# EAGLE board Schema_Electro_v4 (EAGLE 9.7.0)
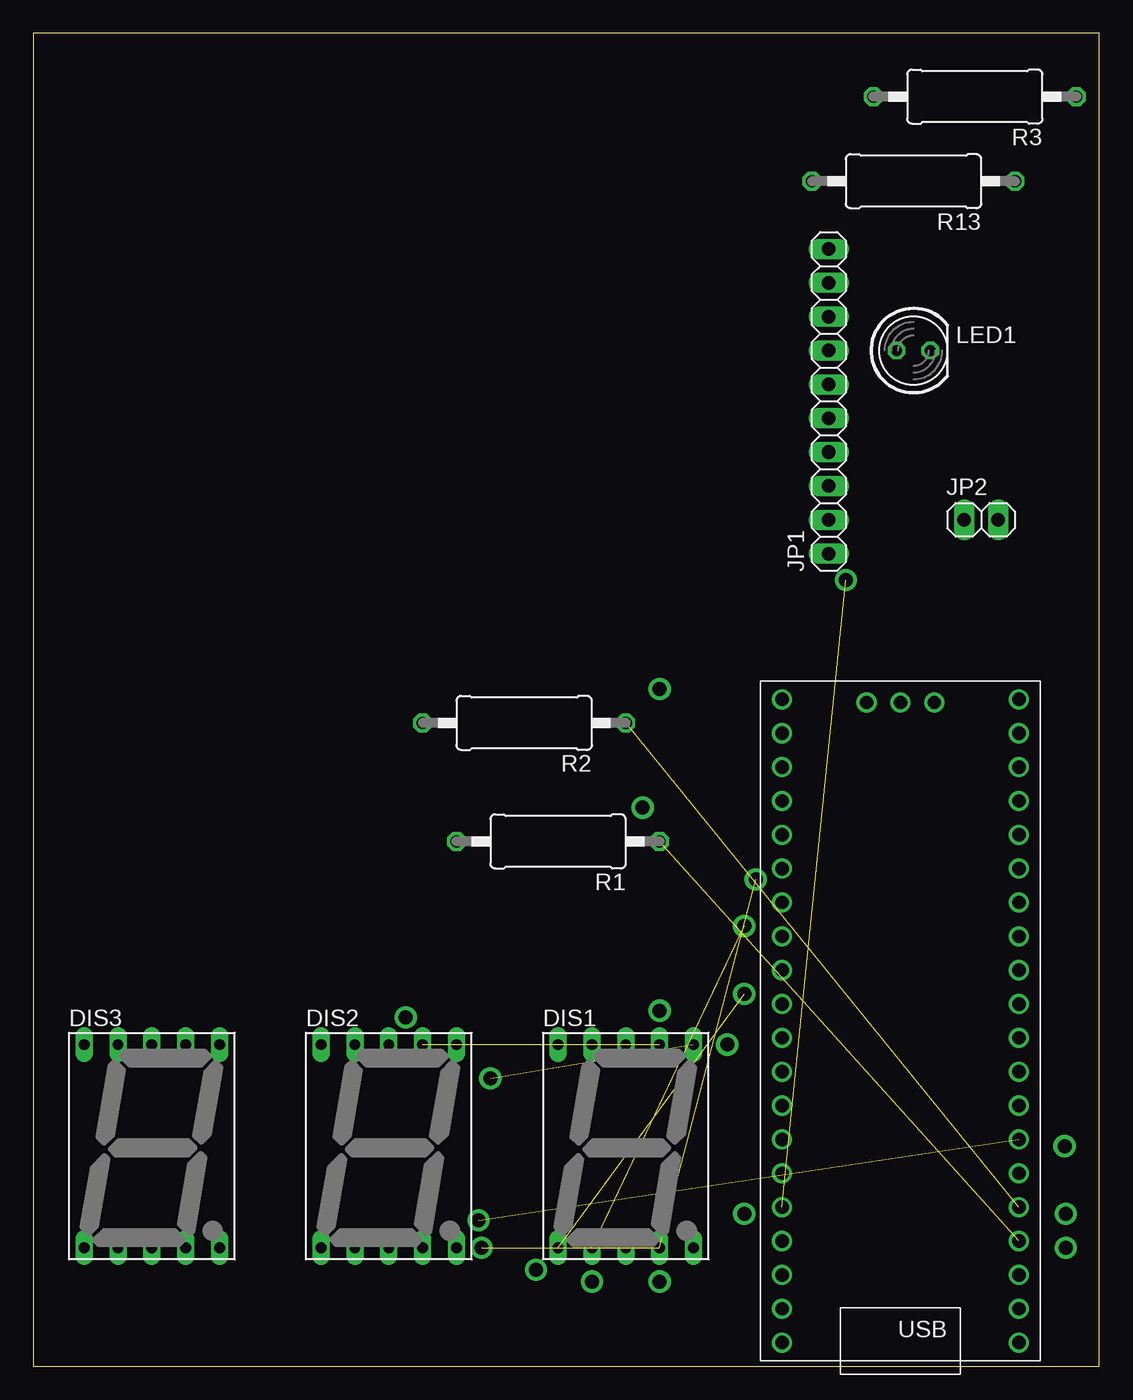
[diagram p0: board, top side]
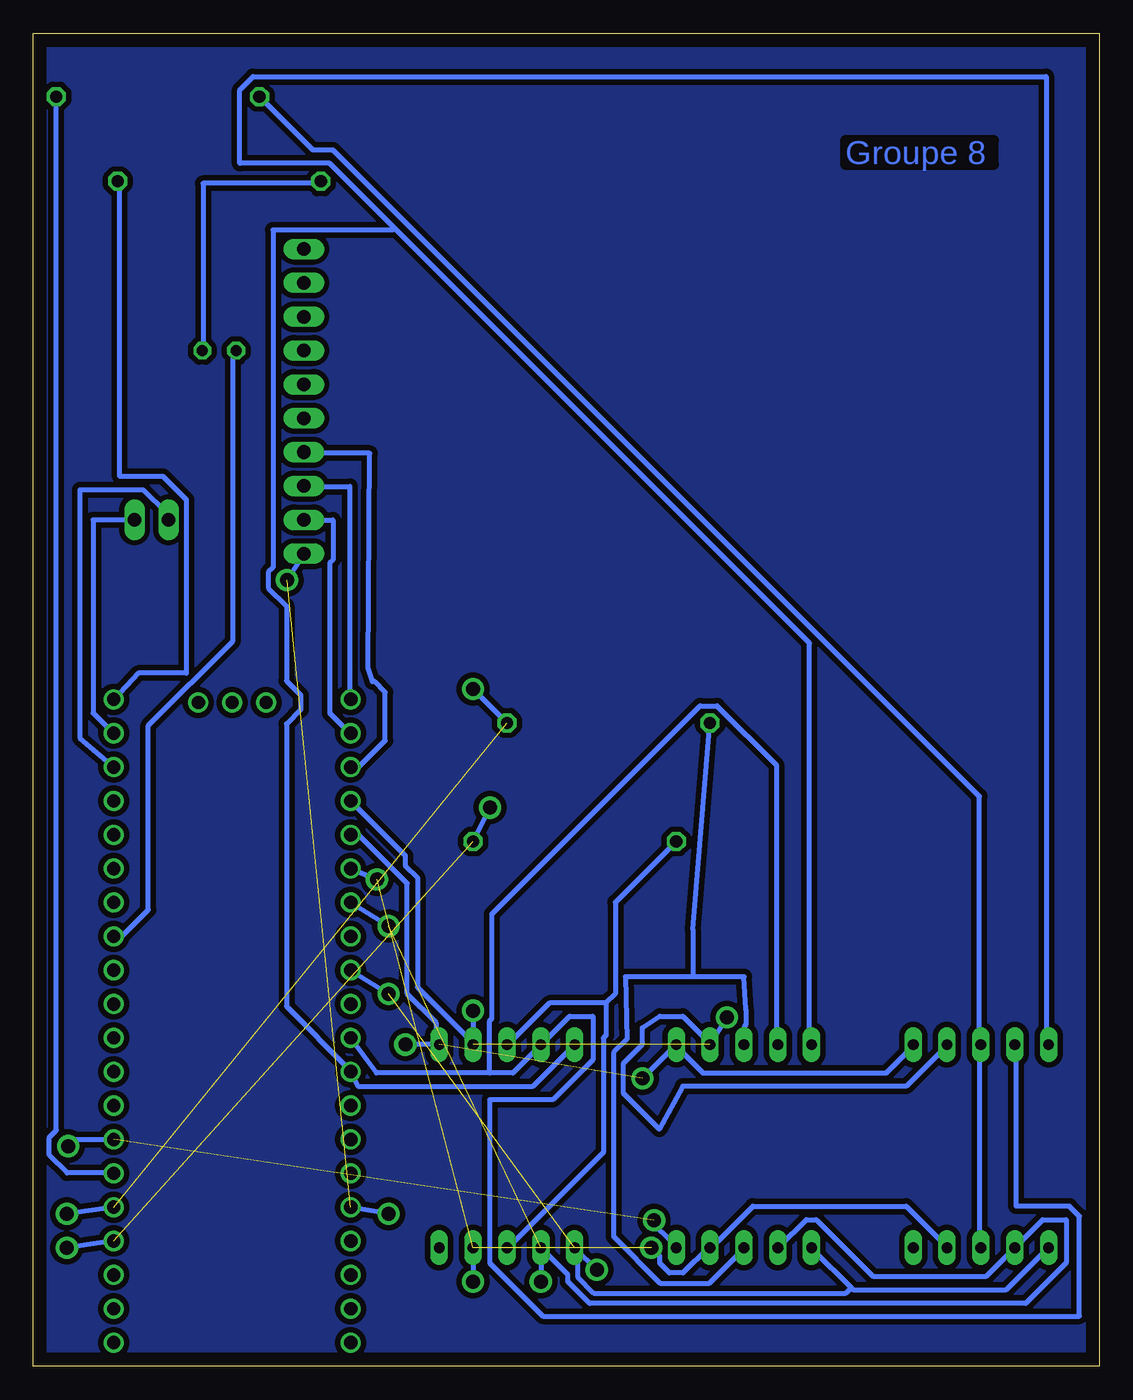
[diagram p1: board, bottom side, seen from below]

Size 79.99 x 100 mm. Coordinates in mm from the lower left corner, seen from the top.
Outline: 0,0 79.99,0 79.99,100 0,100 0,0
Copper layers (1*16): Top 0.035mm / dielectric 1.5mm / Bottom 0.035mm
Design rules "Fusion Electronics Design Rules": minimum track width 15mil, minimum drill 0.35mm, track to track 15mil, track to pad 15mil, pad to pad 15mil, via to via 15mil, smd to smd 6mil, copper to edge 40mil, drill to drill 6mil, minimum pad ring 10mil, minimum via ring 8mil, stop-mask expansion 4mil, vias tented up to drill 0mil, thermal gap 10mil

## Footprints (pad centres in the part's own frame; a part is rotated, then mirrored left to right if it is on the bottom)
HDSP-M = drill 0.813 long: 1 -5.08,-7.62; 2 -2.54,-7.62; 3 0,-7.62; 4 2.54,-7.62; 5 5.08,-7.62; 6 5.08,7.62; 7 2.54,7.62; 8 0,7.62; 9 -2.54,7.62; 10 -5.08,7.62
1X10 = drill 1.016 long: 1 -11.43,0; 2 -8.89,0; 3 -6.35,0; 4 -3.81,0; 5 -1.27,0; 6 1.27,0; 7 3.81,0; 8 6.35,0; 9 8.89,0; 10 11.43,0
1X02 = drill 1.016 long: 1 -1.27,0; 2 1.27,0
LED5MM = drill 0.813 octagon: A -1.27,0; K 1.27,0
0411/15 = drill 0.914 octagon: 1 -7.62,0; 2 7.62,0
FT_RASPBERRY-PI-PICO_TH = drill 1: 1 -8.55,24.03; 2 -8.55,21.49; 3 -8.55,18.95; 4 -8.55,16.41; 5 -8.55,13.87; 6 -8.55,11.33; 7 -8.55,8.79; 8 -8.55,6.25; 9 -8.55,3.71; 10 -8.55,1.17; 11 -8.55,-1.37; 12 -8.55,-3.91; 13 -8.55,-6.45; 14 -8.55,-8.99; 15 -8.55,-11.53; 16 -8.55,-14.07; 17 -8.55,-16.61; 18 -8.55,-19.15; 19 -8.55,-21.69; 20 -8.55,-24.23; 21 9.23,-24.23; 22 9.23,-21.69; 23 9.23,-19.15; 24 9.23,-16.61; 25 9.23,-14.07; 26 9.23,-11.53; 27 9.23,-8.99; 28 9.23,-6.45; 29 9.23,-3.91; 30 9.23,-1.37; 31 9.23,1.17; 32 9.23,3.71; 33 9.23,6.25; 34 9.23,8.79; 35 9.23,11.33; 36 9.23,13.87; 37 9.23,16.41; 38 9.23,18.95; 39 9.23,21.49; 40 9.23,24.03; GND 0.34,-24; SWCLK -2.2,-24; SWDIO 2.88,-24

## Placement (x,y rotation side)
DIS1  HD-H103  [HDSP-M]  44.45,16.51 0 top
DIS2  HD-H103  [HDSP-M]  26.67,16.51 0 top
DIS3  HD-H103  [HDSP-M]  8.89,16.51 0 top
JP1  [1X10]  59.69,72.39 90 top
JP2  [1X02]  71.12,63.5 0 top
LED1  [LED5MM]  66.04,76.2 0 top
R1  [0411/15]  39.37,39.37 180 top
R2  [0411/15]  36.83,48.26 180 top
R3  [0411/15]  70.64,95.25 180 top
R13  [0411/15]  66.04,88.9 180 top
U$1  RASPBERRY-PI-PICO_TH  [FT_RASPBERRY-PI-PICO_TH]  65.41,25.8 180 top

## Library data of the parts
DIS1-DIS3 = display-hp; OC_FARNELL: unknown; OC_NEWARK: unknown
JP1 JP2 = pinhead
LED1 = led
R1-R3 R13 = rcl; SPICEPREFIX: R
U$1 = pipico

## Nets
N$1: R13.1 U$1.20
N$2: JP2.2 U$1.19
N$3: JP2.1 U$1.18
N$4: LED1.A U$1.13
N$5: JP1.1 U$1.36
N$6: JP1.2 U$1.22
N$7: JP1.3 U$1.21
N$8: JP1.4 U$1.23
N$9: R1.1 U$1.4
N$10: DIS2.3 DIS2.8 R2.2
N$11: DIS3.3 DIS3.8 R3.2
N$12: DIS1.7 DIS2.7 DIS3.7 U$1.24
N$13: DIS1.6 DIS2.6 DIS3.6 U$1.25
N$14: DIS1.4 DIS2.4 DIS3.4 U$1.26
N$15: DIS1.2 DIS2.2 DIS3.2 U$1.27
N$16: DIS1.1 DIS2.1 DIS3.1 U$1.29
N$17: DIS1.9 DIS2.9 DIS3.9 U$1.31
N$18: DIS1.10 DIS2.10 DIS3.10 U$1.32
N$19: DIS2.5 U$1.7
N$20: DIS1.3 DIS1.8 R1.2
N$21: R2.1 U$1.5
N$22: R3.1 U$1.6
N$28: LED1.K R13.2

## Tracks (layer width: path | path; a pad name or v marks a point on that pad's centre or on a via)
GND
  pour Bottom (isolate 0.406): 0.08,0.08 79.93,0.08 79.93,100.25 0.08,100.25
N$1
  Bottom 0.381: R13.1 73.5,88.75 73.5,66.75 70.25,66.75 68.5,65 68.5,52 72.11,52 U$1.20
N$2
  Bottom 0.381: U$1.19 74,47.5 75.5,49 75.5,63.5 72.5,63.5 JP2.2
N$3
  Bottom 0.381: U$1.18 76.5,47.15 76.5,65.75 71.75,65.75 70,64 70,63.5 JP2.1
N$4
  Bottom 0.381: LED1.A 65,76 65,54.42 71.36,48.06 71.36,34.24 73.35,32.25 73.75,32.25 U$1.13
N$5  (via drill 1.05 pad 1.67)  (1 unrouted)
  Bottom 0.381: v53.34,11.43 U$1.36 | JP1.1 v60.96,58.98
N$6
  Bottom 0.381: U$1.22 56.25,47.5 57.75,49 57.75,60.25 57.5,60.5 57.5,63.5 59.5,63.5 JP1.2
N$7
  Bottom 0.381: U$1.21 56.25,50.25 56.25,66 59.5,66 JP1.3
N$8
  Bottom 0.381: JP1.4 59.5,68.5 54.75,68.5 54.88,52.37 54.55,51.35 54.36,51.35 53.58,50.58 53.58,46.94 55.57,44.95 U$1.23
N$9  (via drill 1.05 pad 1.67)  (1 unrouted)
  Bottom 0.381: v45.72,41.91 R1.1 | U$1.4 v77.47,8.89
N$10
  Bottom 0.381: DIS2.3 26.75,8.75 29.26,6.24 32.96,6.24 36.46,9.73 36.46,23.53 35.46,24.54 35.56,29.21 30.5,29.21 | 30.5,29.21 30.5,32.78 R2.2 | DIS2.8 26.67,25.45 26.53,25.59 26.53,26.76 26.67,29.21 30.5,29.21
N$11
  Bottom 0.381: DIS3.3 9,9 9,24 DIS3.8 9,24.25 9,42.75 57.5,91.25 59,91.25 63,95.25 R3.2
N$12  (via drill 1.05 pad 1.67)  (1 unrouted)
  Bottom 0.381: DIS3.7 11.5,24 14.5,21 31.25,21 33.02,17.78 35.7,20.46 35.7,22.72 34.29,24.13 34.29,25.4 33,26.25 31.25,26.25 29.25,24.25 DIS2.7 v27.94,26.17 | 46.99,24.24 DIS1.7 | U$1.24 52.08,38.32 52.08,37.57 51.17,36.66 51.17,28.42 46.99,24.24 | v46.99,26.67 46.99,24.24
N$13  (via drill 1.05 pad 1.67)  (1 unrouted)
  Bottom 0.381: DIS3.6 14,24 16,22 29.75,22 31.75,24 DIS2.6 v34.29,21.59 | U$1.25 55.57,39.87 51.93,36.23 51.93,27.93 49.75,25.75 49.75,24.25 DIS1.6 v52.07,24.13
N$14  (via drill 1.05 pad 1.67)  (2 unrouted)
  Bottom 0.381: DIS3.4 11.5,9 14.5,12 26,12 29,9 DIS2.4 29.35,8.89 31.24,7 32.26,7 32.98,7.72 32.98,8.24 v33.63,8.89 | DIS1.4 v46.99,6.35 | U$1.26 v54.21,36.51
N$15  (via drill 1.05 pad 1.67)  (1 unrouted)
  Bottom 0.381: DIS2.2 24,9 22,11 21.25,11 17,6.75 8.5,6.75 6.5,8.75 DIS3.2 6.25,9 4.25,11 2.5,11 2.5,7.75 5.54,4.71 38.26,4.71 39.88,6.33 39.88,6.86 DIS1.2 v41.91,6.35 | U$1.27 v53.34,33.02
N$16  (via drill 1.05 pad 1.67)  (1 unrouted)
  Bottom 0.381: 18.62,5.88 21.5,8.75 DIS2.1 | 18.62,5.88 18.5,5.75 7,5.75 4,8.75 DIS3.1 | 18.62,5.88 19.03,5.47 37.94,5.47 39.12,6.65 39.12,8.62 39.37,8.87 DIS1.1 v37.71,7.23 | U$1.29 v53.34,27.94
N$17
  Bottom 0.381: DIS3.9 6.25,24 6.25,12 2.25,12 1.5,11.25 1.5,3.75 41.75,3.75 45.75,7.75 45.75,20 41,20 38,23 38,26.25 39.75,26.25 41.75,24.25 DIS1.9 42,24 44,22 45.75,22 | DIS2.9 24.25,24.25 24.25,45.11 28.68,49.54 29.96,49.54 45.58,33.92 45.58,26.09 45.75,25.92 45.75,22 | 45.75,22 54.24,22 U$1.31
N$18
  Bottom 0.381: DIS1.10 39.5,24 42.5,21 55.62,21 U$1.32 56.25,22.25 61,27 61,48.18 59.93,49.25 59.93,50.35 61,51.42 61,57.03 62.37,58.4 62.37,59.56 62,59.93 62,85.25 53,85.25 52.88,85.38 | 52.88,85.38 21.75,54.25 21.75,24.25 DIS2.10 | 52.88,85.38 57.75,90.25 64.5,90.25 64.5,95.75 63.5,96.75 4,96.75 4,24.25 DIS3.10
N$19  (via drill 1.05 pad 1.67)  (1 unrouted)
  Bottom 0.381: DIS2.5 32.22,9.36 32.22,9.47 33.41,10.66 v33.41,10.94 | v77.38,16.51 76.88,17.01 U$1.7
N$20
  Bottom 0.381: DIS1.3 44.25,9 37.22,16.03 37.22,24.62 37.02,24.82 37.02,27.25 | 37.02,27.25 41.25,27.25 44.25,24.25 DIS1.8 | 37.02,27.25 36.32,27.95 36.32,34.8 R1.2
N$21  (via drill 1.05 pad 1.67)  (1 unrouted)
  Bottom 0.381: R2.1 v46.99,50.8 | U$1.5 v77.47,11.43
N$22
  Bottom 0.381: U$1.6 74,14.5 77.45,14.5 78.78,15.83 78.78,17.19 78.26,17.71 R3.1
N$28
  Bottom 0.381: LED1.K 67.25,76.25 67.25,88.75 58.5,88.75 R13.2

## Text on the board
Bottom: Groupe 8